# Altium PCB YAW.PcbDoc (part 2 of 3)
Units mil, origin at the board's own origin, x right, y up, seen from the top; angles counter-clockwise.
Board outline 2374.09 x 1897.47 mil, 6 copper layers (Top Layer, Layer 1, Layer 2, Layer 3, Layer 4, Bottom Layer), stack 32.112 mil thick; 77 components, 82 nets, 341 pads, 389 vias.
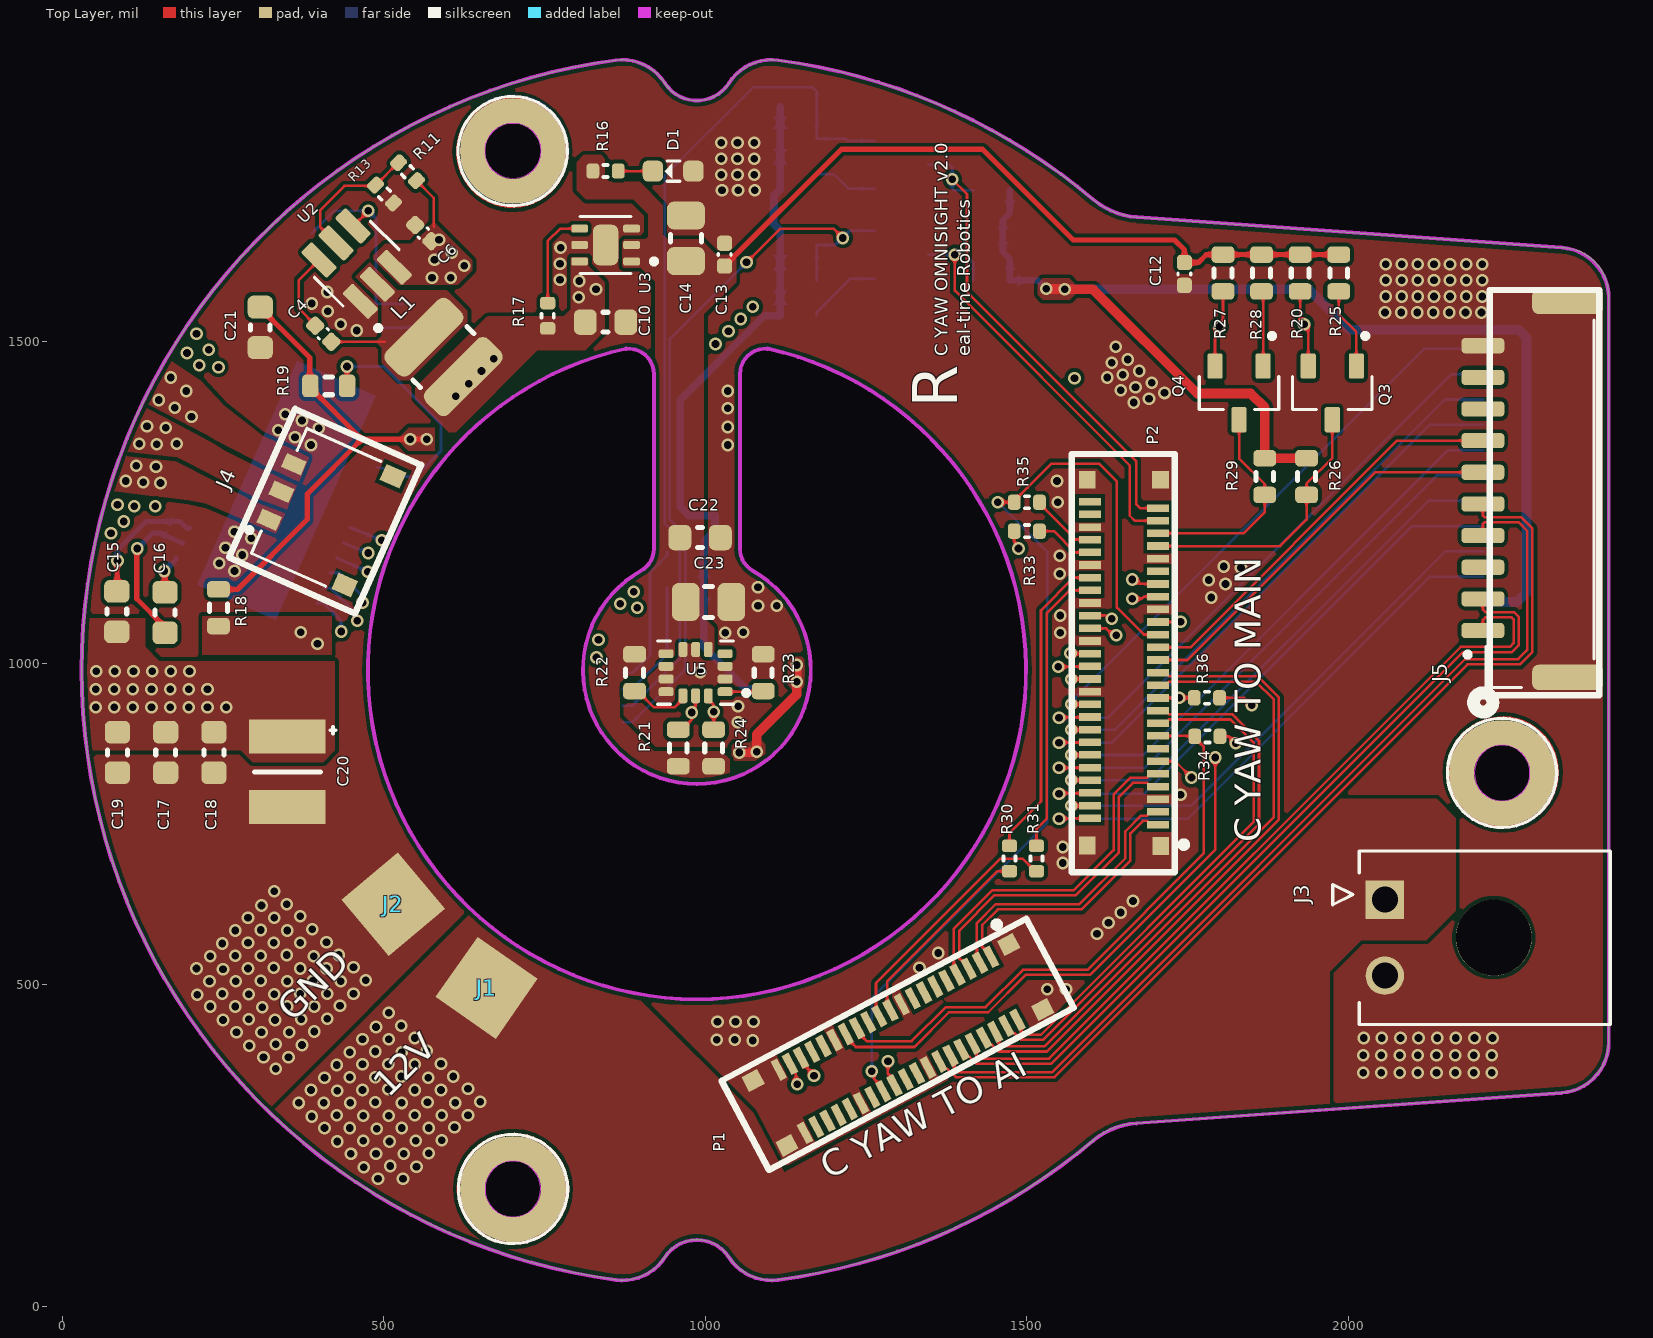
[diagram p0: Top Layer view]

## Via types
v1: diameter 19.68, hole 11.9, Top Layer to Bottom Layer, tented both sides, 389 vias

## Nets (pads, with @x,y where several pads share a name; then routed paths per layer and width w, separated by ;. In a path a pad name is that pad's centre, name@x,y a point inside that pad or via, vN(x,y) a via of type N, cw(c..) or ccw(c..) an arc to the next point about the centre after c; other vN are vias at no path point) (continued)
C_Main_SWCLK: (continued)
  Bottom Layer w4: v1(1569,936) 1569,940 2117.54,1488.54 J6.12@2209.67,1488.54
C_Main_SWDIO: J6.11 P2.18 | length 929.4
  Top Layer w4: v1(1550,915) 1550.57,915.57 1597.43,915.57 P2.18@1598,916.15
  Bottom Layer w4: v1(1550,915) 1626,915 2160.17,1449.17 J6.11@2209.67,1449.17
C_Yaw_TIM1_CH1: P2.24 U4.27 | length 2182.4
  Top Layer w4: v1(1569,975) 1569.1,975.1 1597.9,975.1 P2.24@1598,975.2
  Layer 1 w4: v1(1074,1554) 1529,1554 1594,1489 1594,986 1584.84,976.84 1570.84,976.84 v1(1569,975)
  Layer 4 w4: v1(434,1049) 434,1319 662,1547 1008,1547 1015,1554 v1(1074,1554)
  Bottom Layer w5: U4.27@395.74,1093.48 406.22,1093.48 433.7,1066 433.7,1049.3 v1(434,1049)
C_Yaw_TIM1_CH2: P2.26 U4.25 | length 2007.3
  Top Layer w4: v1(1549,994) 1549.44,994.44 1597.56,994.44 P2.26@1598,994.89
  Layer 1 w4: v1(1036,1516) 1406,1516 1585,1337 1585,1004 1575,994 v1(1549,994)
  Layer 4 w4: v1(467,1094) 467,1118.94 457,1128.94 457,1313 660,1516 v1(1036,1516)
  Bottom Layer w5: U4.25@416.56,1140.23 430.77,1140.23 467,1104 v1(467,1094)
C_Yaw_TIM1_CH3: P2.28 U4.23 | length 1798.4
  Top Layer w4: v1(1568,1015) 1568.21,1014.79 1597.79,1014.79 P2.28@1598,1014.57
  Layer 1 w4: v1(1016,1496) 1052,1496 1062,1506 1403,1506 1575,1334 1575,1025.19 1568,1018.19 v1(1568,1015)
  Layer 4 w4: v1(476,1171) 476,1320 662,1506 1001.13,1506 1011.13,1496 v1(1016,1496)
  Bottom Layer w5: U4.23@437.38,1186.99 v1(476,1171)
CAN_H: P1.37 P2.39 | length 1311.8
  Top Layer w4: P1.37@1131.57,376.87 1131.57,370.43 1141,361 1141,347 v1(1143,345) ; v1(1664,1130) 1668.87,1130 1675.87,1123 1703.75,1123 P2.39@1703.91,1122.84
  Layer 1 w4: v1(1143,345) 1143,344.69 1176.69,311 1296.31,311 1709,723.69 1709,1141 1701,1149 1670,1149 1665.52,1144.52 1665.52,1131.52 v1(1664,1130)
CAN_L: P1.35 P2.37 | length 1197.9
  Top Layer w4: P1.35@1148.95,386.12 1148.95,379.8 1169,359.75 v1(1169,358) ; v1(1664,1100) 1679,1100 1682.15,1103.15 P2.37@1703.91,1103.15
  Layer 1 w4: v1(1169,358) 1169,330 1180,319 1293,319 1699,725 1699,1025 1664,1060 v1(1664,1100)
ETHE1_RX_N: P1.7 P2.9 | length 541.6
  Top Layer w4: P1.7@1392.28,515.5 1386.31,521.47 1386.31,586.63 1446.69,647 1573,647 1635,709 1635,795.31 1661.41,821.72 1687.04,821.72 1692.88,827.56 P2.9@1703.91,827.56
ETHE1_RX_P: P1.5 P2.7 | length 522.4
  Top Layer w4: P1.5@1409.66,524.74 1409.66,525.92 1395,540.58 1395,584 1450,639 1576.31,639 1643,705.69 1643,792 1664.72,813.72 1687.04,813.72 1692.88,807.88 P2.7@1703.91,807.88
ETHE1_TX_N: P1.3 P2.3 | length 441.4
  Top Layer w4: P1.3@1427.04,533.98 1422.31,538.71 1422.31,595.63 1451.67,624.99 1581.67,624.99 1653,696.31 1653,738.31 1677.35,762.67 1687.04,762.67 1692.88,768.51 P2.3@1703.91,768.51
ETHE1_TX_P: P1.1 P2.1 | length 422.5
  Top Layer w4: P1.1@1444.43,543.22 1444.43,544.57 1430.66,558.34 1430.66,592.66 1454.99,616.99 1584.99,616.99 1661,693 1661,735 1680.67,754.67 1687.04,754.67 1692.88,748.82 P2.1@1703.91,748.82
ETHE1C_TX_N: P1.11
ETHE1C_TX_P: P1.9
ETHE1D_RX_N: P1.15
ETHE1D_RX_P: P1.13
ETHE2_RX_N: P1.8 P2.25 | length 1010.6
  Top Layer w4: P1.8@1433.31,417.37 1433.31,417.18 1444.47,406.02 1445.98,406.02 1456,396 1531,396 1892,757 1892,946.31 1859.11,979.2 1720.77,979.2 1714.93,985.04 P2.25@1703.91,985.04
ETHE2_RX_P: P1.6 P2.23 | length 975.3
  Top Layer w4: P1.6@1450.69,426.61 1456.61,420.69 1456.61,406.71 1459.32,404 1527.69,404 1884,760.31 1884,943 1855.8,971.2 1720.77,971.2 1714.93,965.36 P2.23@1703.91,965.36